# Altium PCB single-smt-bottom.PcbDoc
Units mil, origin at the board's own origin, x right, y up, seen from the top; angles counter-clockwise.
Board outline 2305 x 1285.79 mil, 2 copper layers (Top Layer, Bottom Layer); 1 components, 0 nets, 2 pads, 0 vias.
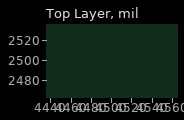
[diagram p0: Top Layer view]
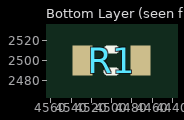
[diagram p1: Bottom Layer view, seen from below]

## Layer stack, top to bottom
Top Solder: solder mask 0.4, Solder Resist, Dk 3.5
Top Layer: signal copper 1.4
Dielectric 1: dielectric 12.6, FR-4, Dk 4.8
Bottom Layer: signal copper 1.4
Bottom Solder: solder mask 0.4, Solder Resist, Dk 3.5

## Board outline
3185,1915 3185,3200.79 5490,3200.79 5490,1915

## Design rules (kind name [scope] priority, off if disabled: settings)
Clearance [All] p1: gap=10 ignorepadtopadclearanceinfootprint=FALSE except(0: Arc-Hole Track-Hole SMDPad-Hole THPad-Hole Via-Hole Fill-Hole Poly-Hole Region-Hole Text-Hole)
PolygonConnect [All] p1: connectstyle=Relief reliefconductorwidth=10 reliefentries=4 polygonreliefangle="90 Angle" airgapwidth=10
RoutingVias [All] p1: holewidth=28 width=50 viastyle="Through Hole" minholewidth=28 minwidth=50 maxholewidth=28 maxwidth=50
SolderMaskExpansion [All] p1: expansion=0 istentingtop=FALSE
Width [All] p1: maxlimit=10 minlimit=10 preferedwidth=10
30 further rules are at their usual default settings.

## Components (designator, comment, footprint, x,y, rotation, side; value= is the part's Value field where it differs from the comment)
R1 "1kΩ" R0603_0.55MM_HD 4500,2500 r180 bottom

## Footprints (in the part's own frame and the unit in brackets; to place one, negate y for a bottom-side part, rotate by r counter-clockwise, add the part's x,y. Pads: shape width x height; smd on the part's side, far side on the other; paste and mask are expansions set on the pad)
R0603_0.55MM_HD [mm] "Resistor 0603 High Density"
  rect 0.5x0.75 smd: 1(-0.725,0) 2(0.725,0)
  silkscreen extent -0.1,-0.28 0.1,0.28, body extent -0.8,-0.4 0.8,0.4, height 0.55

## Part data
R1: library part ERJ-3EKF1001V, "RES 1K OHM 1/10W 1% 0603 SMD", specs_limiting_element_voltage=75, specs_maximum_overload_voltage=150, specs_maximum_working_voltage=10.0V, specs_package="0603 (1608 Metric)", specs_package_power="0603  (0.1W)", specs_power_watts="0.1W- 1/10W", specs_ratings=AEC-Q200, specs_resistance_ohms=1k, specs_sort_value=1000.0, specs_sort_value_package=603_1000, specs_supplier_package=603, specs_temperature_coefficient=±100ppm/°C, specs_tolerance=±1%, Supplier Part Number 1=C118155, mfg="Panasonic Electronic Components", mpn=ERJ-3EKF1001V, panel_monkey__generated_schlib_path=symbols/ERJ-3EKF1001V-019dd87a.SchLib, panel_monkey__generated_symbol_ref=ERJ-3EKF1001V, panel_monkey__part_id=019dd87a-2b07-7d36-a02e-a4e16c3a20b0, panel_monkey__source_handle=ERJ-3EKF1001V, panel_monkey__source_symbol_ref=R_2P, panel_monkey__version_id=019dd87a-2b07-7877-a63c-8eed0be27899, specs_composition="Thick Film", specs_features=-, specs_height=0.55MM, specs_number_of_terminations=2, specs_packaging="Cut Tape (CT)", specs_substitution_notes="1k , ±1% , 0603 , AEC-Q200", Supplier 1=JLCPCB, Supplier Provider Name 1=jlcpcb

## Nets (pads, with @x,y where several pads share a name; then routed paths per layer and width w, separated by ;. In a path a pad name is that pad's centre, name@x,y a point inside that pad or via, vN(x,y) a via of type N, cw(c..) or ccw(c..) an arc to the next point about the centre after c; other vN are vias at no path point)
pads on no net: R1.1 R1.2

## Silkscreen, mask and mechanical layers (free items; w line width, h text height)
Mechanical 8:
  the board outline again, w10